# EAGLE board Control_Logic (EAGLE 9.6.2), part 1 of 2
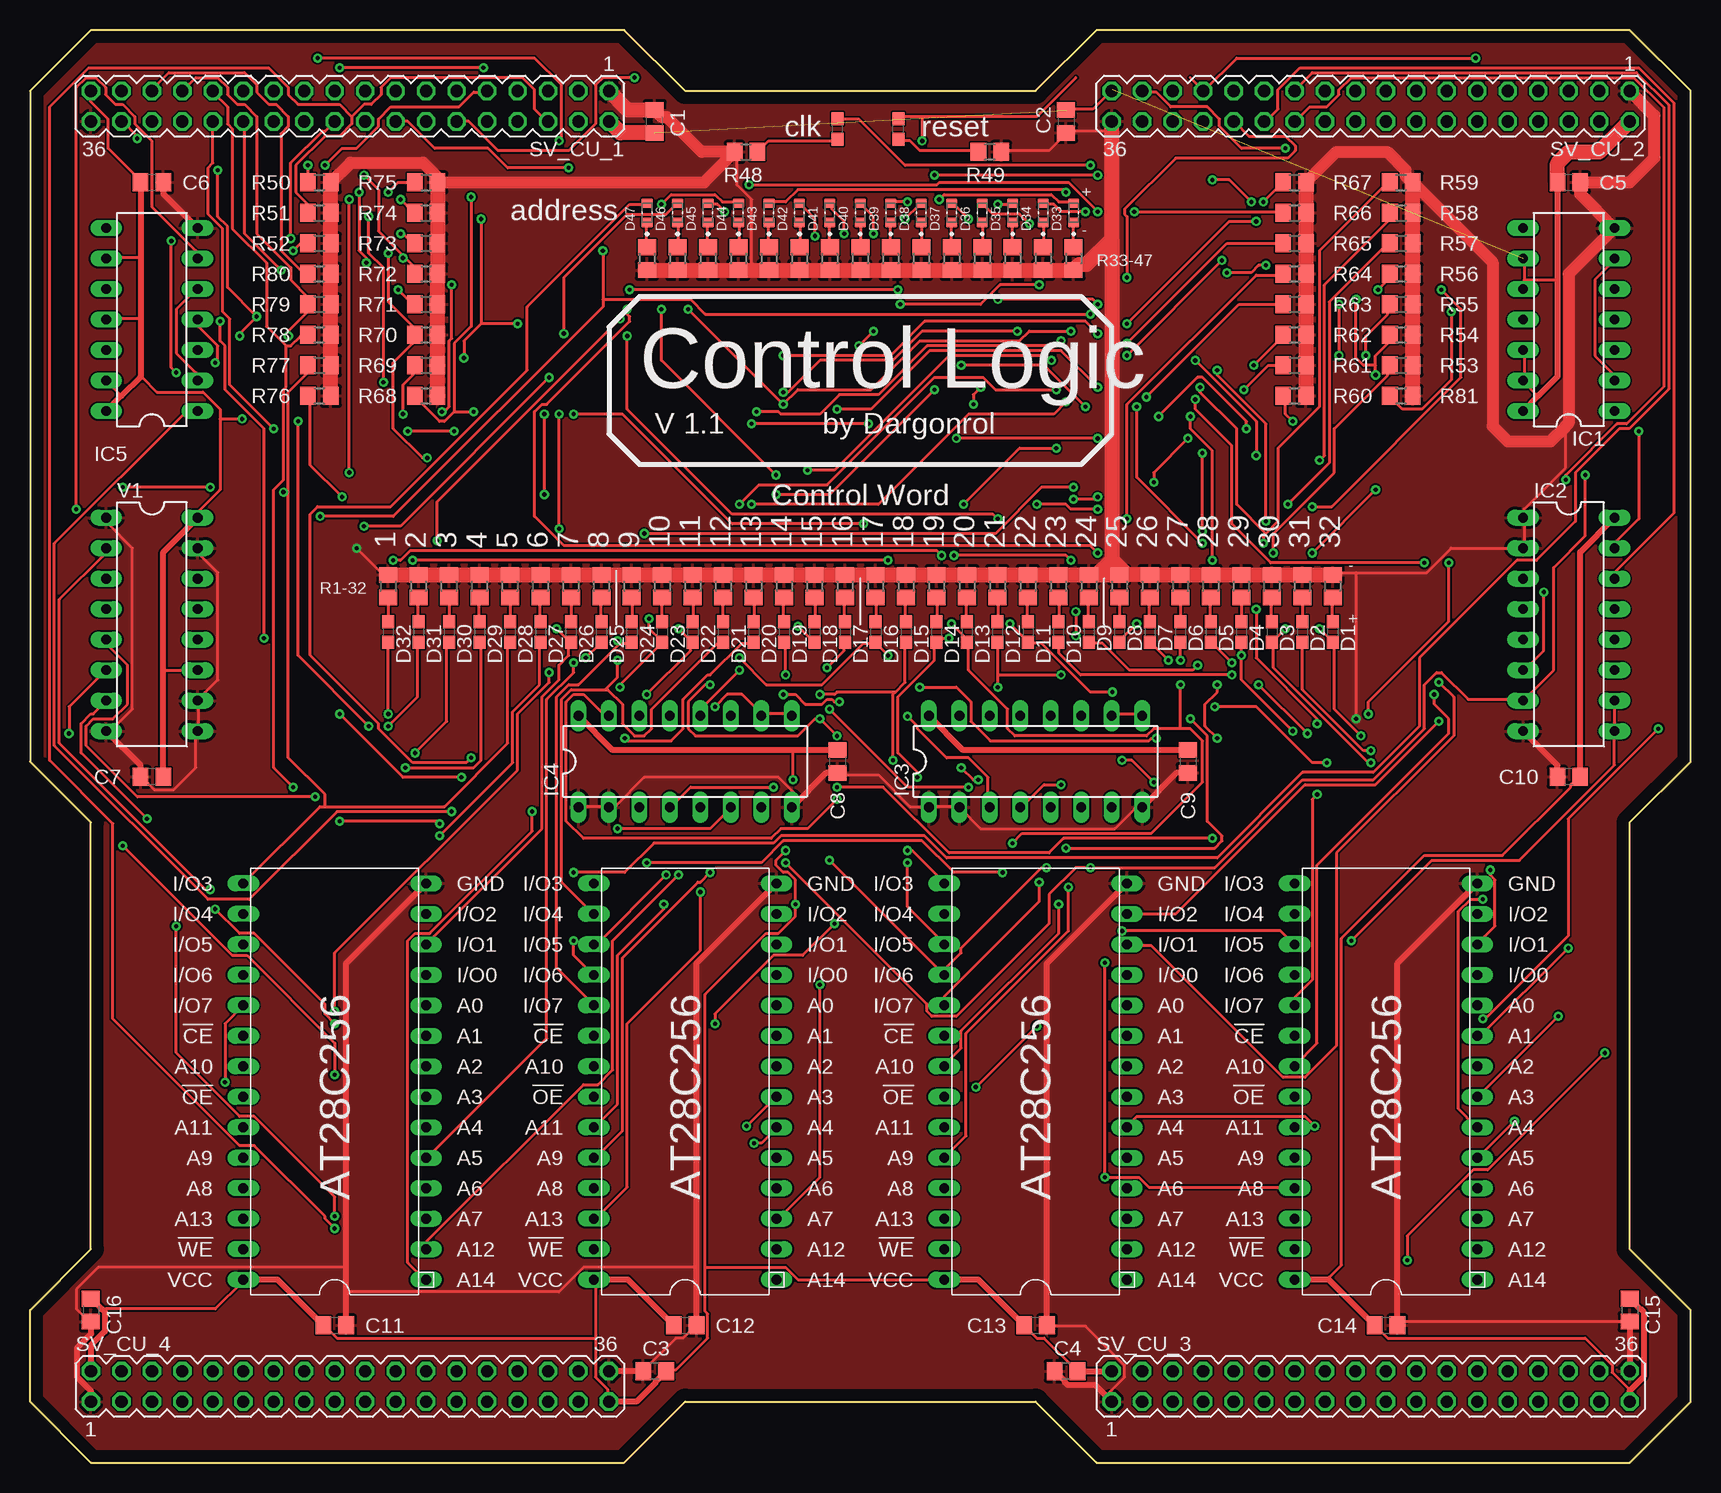
[diagram p0: board, top side]
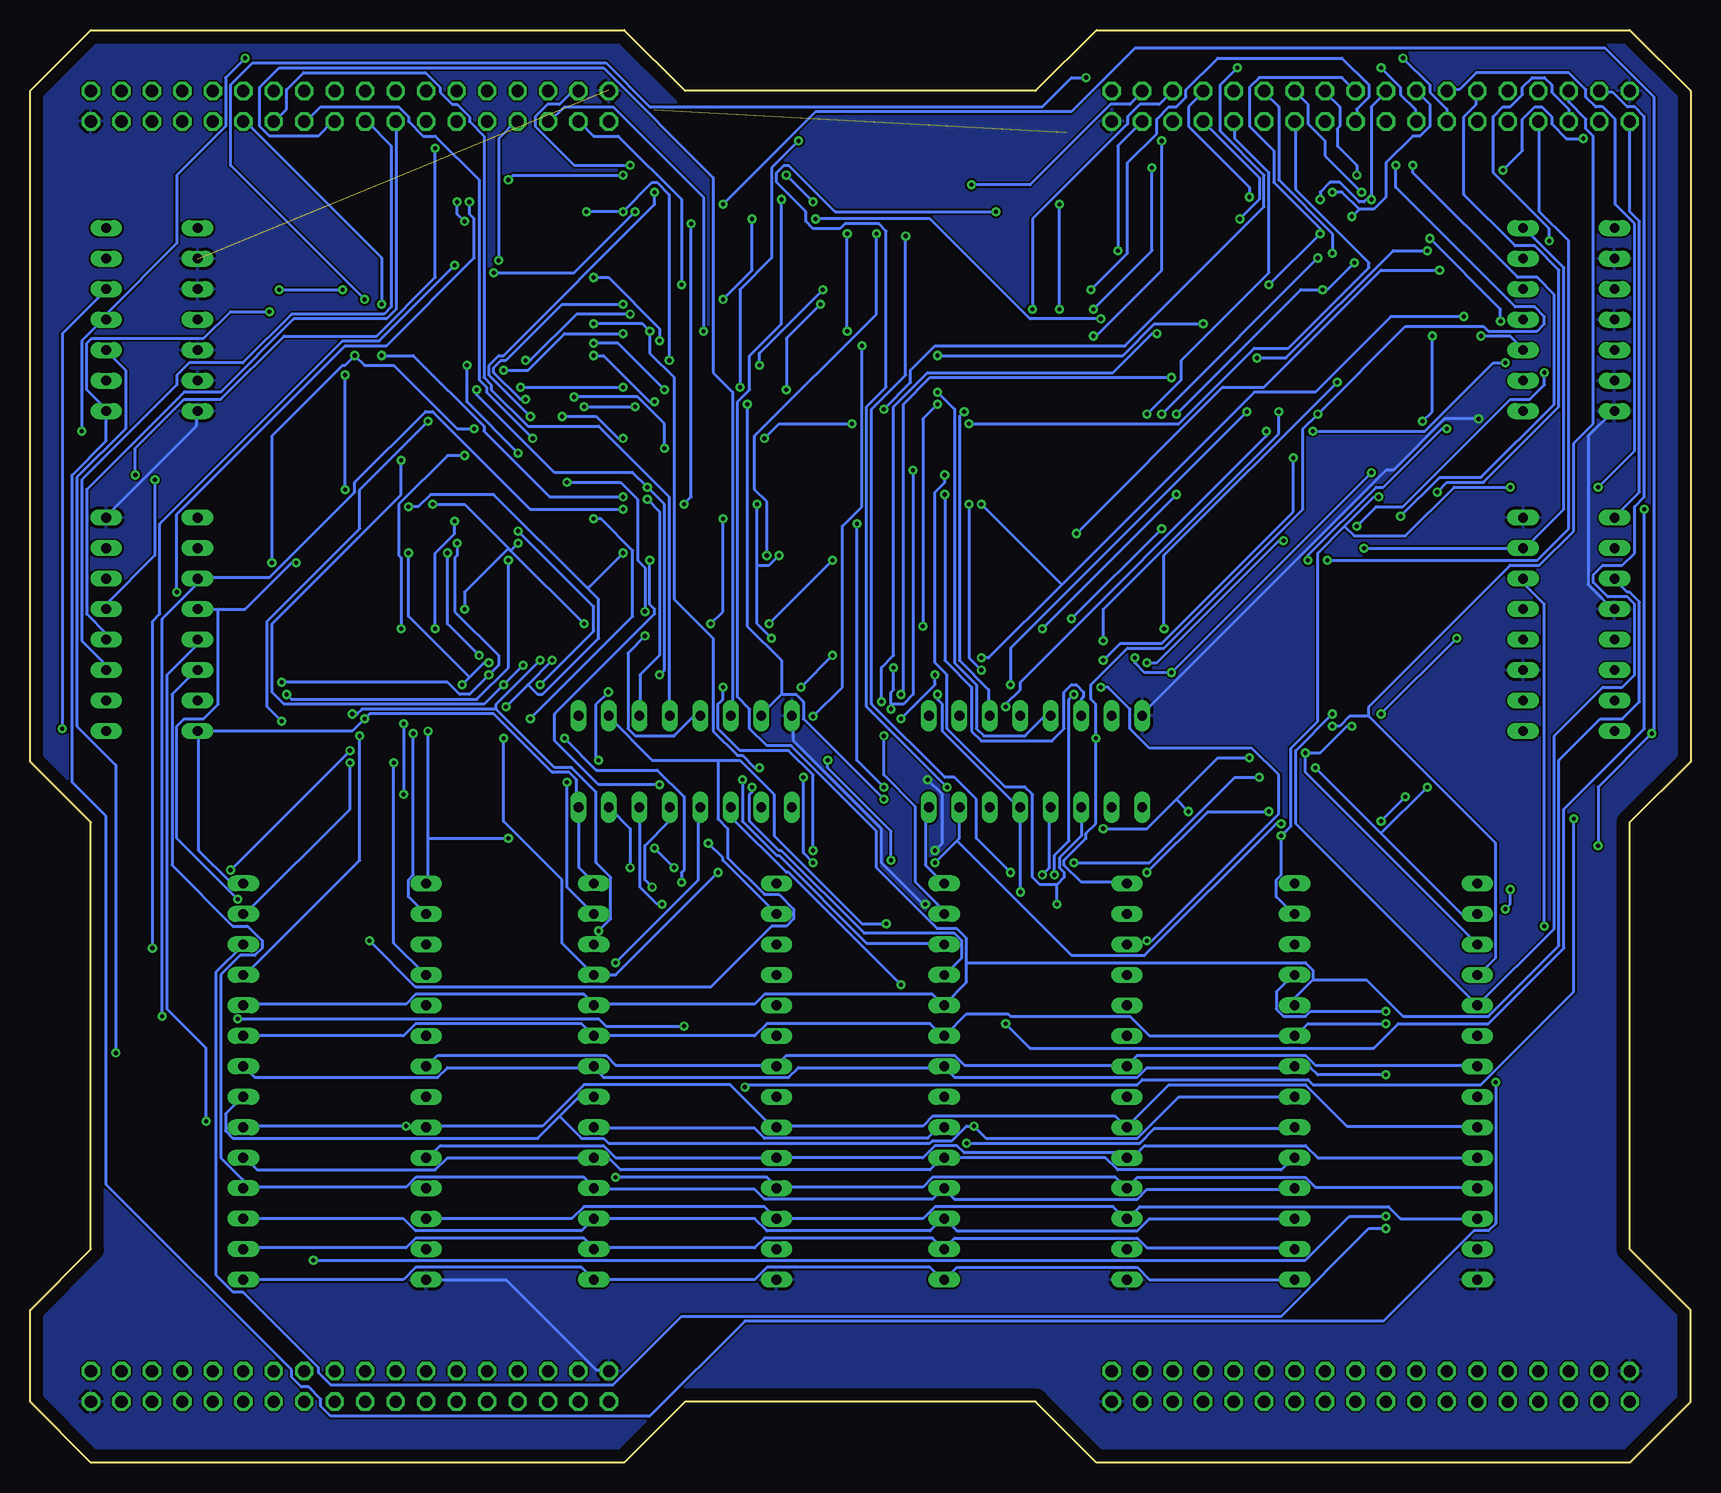
[diagram p1: board, bottom side, seen from below]

Size 138.43 x 119.38 mm. Coordinates in mm from the lower left corner, seen from the top.
Outline: 5.08,0 49.53,0 54.61,5.08 83.82,5.08 88.9,0 133.35,0 138.43,5.08 138.43,12.7 133.35,17.78 133.35,53.34 138.43,58.42 138.43,114.3 133.35,119.38 88.9,119.38 83.82,114.3 54.61,114.3 49.53,119.38 5.08,119.38 0,114.3 0,58.42 5.08,53.34 5.08,17.78 0,12.7 0,5.08 5.08,0
Copper layers (1*16): Top 0.035mm / dielectric 1.5mm / Bottom 0.035mm
Design rules "default *": minimum track width 10mil, minimum drill 0.35mm, track to track 6mil, track to pad 6mil, pad to pad 6mil, via to via 6mil, smd to smd 6mil, copper to edge 40mil, drill to drill 6mil, minimum pad ring 10mil, minimum via ring 8mil, stop-mask expansion 4mil, vias tented up to drill 0mil, thermal gap 10mil

## Footprints (pad centres in the part's own frame; a part is rotated, then mirrored left to right if it is on the bottom)
C0805 = smd 1.3 x 1.5: 1 -0.95,0; 2 0.95,0
0603 = smd 1.1 x 1: 1 -0.85,0; 2 0.85,0
LEDC1608X45N = smd 0.81 x 0.93: A 0.81,0; C -0.81,0
DIL14 = drill 0.813 long: 1 -7.62,-3.81; 2 -5.08,-3.81; 3 -2.54,-3.81; 4 0,-3.81; 5 2.54,-3.81; 6 5.08,-3.81; 7 7.62,-3.81; 8 7.62,3.81; 9 5.08,3.81; 10 2.54,3.81; 11 0,3.81; 12 -2.54,3.81; 13 -5.08,3.81; 14 -7.62,3.81
DIL16 = drill 0.813 long: 1 -8.89,-3.81; 2 -6.35,-3.81; 3 -3.81,-3.81; 4 -1.27,-3.81; 5 1.27,-3.81; 6 3.81,-3.81; 7 6.35,-3.81; 8 8.89,-3.81; 9 8.89,3.81; 10 6.35,3.81; 11 3.81,3.81; 12 1.27,3.81; 13 -1.27,3.81; 14 -3.81,3.81; 15 -6.35,3.81; 16 -8.89,3.81
R0805 = smd 1.3 x 1.5: 1 -0.95,0; 2 0.95,0
MA18-2 = drill 1.016 octagon: 1 -21.59,-1.27; 2 -21.59,1.27; 3 -19.05,-1.27; 4 -19.05,1.27; 5 -16.51,-1.27; 6 -16.51,1.27; 7 -13.97,-1.27; 8 -13.97,1.27; 9 -11.43,-1.27; 10 -11.43,1.27; 11 -8.89,-1.27; 12 -8.89,1.27; 13 -6.35,-1.27; 14 -6.35,1.27; 15 -3.81,-1.27; 16 -3.81,1.27; 17 -1.27,-1.27; 18 -1.27,1.27; 19 1.27,-1.27; 20 1.27,1.27; 21 3.81,-1.27; 22 3.81,1.27; 23 6.35,-1.27; 24 6.35,1.27; 25 8.89,-1.27; 26 8.89,1.27; 27 11.43,-1.27; 28 11.43,1.27; 29 13.97,-1.27; 30 13.97,1.27; 31 16.51,-1.27; 32 16.51,1.27; 33 19.05,-1.27; 34 19.05,1.27; 35 21.59,-1.27; 36 21.59,1.27
AT28C256 = drill 0.813 long: !CE 7.62,-5.08; !OE 7.62,0; !WE 7.62,12.7; A0 -7.62,-7.62; A1 -7.62,-5.08; A2 -7.62,-2.54; A3 -7.62,0; A4 -7.62,2.54; A5 -7.62,5.08; A6 -7.62,7.62; A7 -7.62,10.16; A8 7.62,7.62; A9 7.62,5.08; A10 7.62,-2.54; A11 7.62,2.54; A12 -7.62,12.7; A13 7.62,10.16; A14 -7.62,15.24; GND -7.62,-17.78; I/O0 -7.62,-10.16; I/O1 -7.62,-12.7; I/O2 -7.62,-15.24; I/O3 7.62,-17.78; I/O4 7.62,-15.24; I/O5 7.62,-12.7; I/O6 7.62,-10.16; I/O7 7.62,-7.62; VCC 7.62,15.24

## Placement (x,y rotation side)
C1  [C0805]  52.07,111.76 90 top
C2  [C0805]  86.36,111.76 270 top
C3  [C0805]  52.07,7.62 180 top
C4  [C0805]  86.36,7.62 180 top
C5  [C0805]  128.27,106.68 0 top
C6  [C0805]  10.16,106.68 0 top
C7  [C0805]  10.16,57.15 180 top
C8  [C0805]  67.31,58.42 270 top
C9  [C0805]  96.52,58.42 270 top
C10  [C0805]  128.27,57.15 180 top
C11  [C0805]  25.4,11.43 0 top
C12  [C0805]  54.61,11.43 0 top
C13  [C0805]  83.82,11.43 0 top
C14  [C0805]  113.03,11.43 0 top
C15  [C0805]  133.35,12.7 270 top
C16  [C0805]  5.08,12.7 270 top
CLK_LED  LTST-C193TBKT-5A  [0603]  67.31,111.12 90 top
D1  LTST-C193TBKT-5A  [0603]  108.58,69.22 270 top
D2  LTST-C193TBKT-5A  [0603]  106.05,69.22 270 top
D3  LTST-C193TBKT-5A  [0603]  103.5,69.22 270 top
D4  LTST-C193TBKT-5A  [0603]  100.97,69.22 270 top
D5  LTST-C193TBKT-5A  [0603]  98.42,69.22 270 top
D6  LTST-C193TBKT-5A  [0603]  95.89,69.22 270 top
D7  LTST-C193TBKT-5A  [0603]  93.34,69.22 270 top
D8  LTST-C193TBKT-5A  [0603]  90.81,69.22 270 top
D9  LTST-C193TBKT-5A  [0603]  88.27,69.22 270 top
D10  LTST-C193TBKT-5A  [0603]  85.72,69.22 270 top
D11  LTST-C193TBKT-5A  [0603]  83.19,69.22 270 top
D12  LTST-C193TBKT-5A  [0603]  80.64,69.22 270 top
D13  LTST-C193TBKT-5A  [0603]  78.11,69.22 270 top
D14  LTST-C193TBKT-5A  [0603]  75.56,69.22 270 top
D15  LTST-C193TBKT-5A  [0603]  73.03,69.22 270 top
D16  LTST-C193TBKT-5A  [0603]  70.48,69.22 270 top
D17  LTST-C193TBKT-5A  [0603]  67.94,69.22 270 top
D18  LTST-C193TBKT-5A  [0603]  65.41,69.22 270 top
D19  LTST-C193TBKT-5A  [0603]  62.87,69.22 270 top
D20  LTST-C193TBKT-5A  [0603]  60.33,69.22 270 top
D21  LTST-C193TBKT-5A  [0603]  57.78,69.22 270 top
D22  LTST-C193TBKT-5A  [0603]  55.24,69.22 270 top
D23  LTST-C193TBKT-5A  [0603]  52.7,69.22 270 top
D24  LTST-C193TBKT-5A  [0603]  50.16,69.22 270 top
D25  LTST-C193TBKT-5A  [0603]  47.62,69.22 270 top
D26  LTST-C193TBKT-5A  [0603]  45.09,69.22 270 top
D27  LTST-C193TBKT-5A  [0603]  42.55,69.22 270 top
D28  LTST-C193TBKT-5A  [0603]  40.01,69.22 270 top
D29  LTST-C193TBKT-5A  [0603]  37.47,69.22 270 top
D30  LTST-C193TBKT-5A  [0603]  34.92,69.22 270 top
D31  LTST-C193TBKT-5A  [0603]  32.38,69.22 270 top
D32  LTST-C193TBKT-5A  [0603]  29.84,69.22 270 top
D33  LTST-C193KRKT-5A  [LEDC1608X45N]  87,104.14 90 top
D34  LTST-C193KRKT-5A  [LEDC1608X45N]  84.45,104.14 90 top
D35  LTST-C193KRKT-5A  [LEDC1608X45N]  81.92,104.14 90 top
D36  LTST-C193KRKT-5A  [LEDC1608X45N]  79.38,104.14 90 top
D37  LTST-C193KRKT-5A  [LEDC1608X45N]  76.83,104.14 90 top
D38  LTST-C193KRKT-5A  [LEDC1608X45N]  74.3,104.14 90 top
D39  LTST-C193KRKT-5A  [LEDC1608X45N]  71.75,104.14 90 top
D40  LTST-C193KRKT-5A  [LEDC1608X45N]  69.22,104.14 90 top
D41  LTST-C193KRKT-5A  [LEDC1608X45N]  66.67,104.14 90 top
D42  LTST-C193KRKT-5A  [LEDC1608X45N]  64.14,104.14 90 top
D43  LTST-C193KRKT-5A  [LEDC1608X45N]  61.59,104.14 90 top
D44  LTST-C193KRKT-5A  [LEDC1608X45N]  59.05,104.14 90 top
D45  LTST-C193KRKT-5A  [LEDC1608X45N]  56.52,104.14 90 top
D46  LTST-C193KRKT-5A  [LEDC1608X45N]  53.98,104.14 90 top
D47  LTST-C193KRKT-5A  [LEDC1608X45N]  51.44,104.14 90 top
IC1  74HCT32N  [DIL14]  128.27,95.25 90 top
IC2  74HCT173N  [DIL16]  128.27,69.85 270 top
IC3  74HCT173N  [DIL16]  83.82,58.42 0 top
IC4  74HCT173N  [DIL16]  54.61,58.42 0 top
IC5  74HCT04N  [DIL14]  10.16,95.25 90 top
R1  [R0805]  108.58,73.03 270 top
R2  [R0805]  106.05,73.03 270 top
R3  [R0805]  103.5,73.03 270 top
R4  [R0805]  100.97,73.03 270 top
R5  [R0805]  98.42,73.03 270 top
R6  [R0805]  95.89,73.03 270 top
R7  [R0805]  93.34,73.03 270 top
R8  [R0805]  90.81,73.03 270 top
R9  [R0805]  88.27,73.03 270 top
R10  [R0805]  85.72,73.03 270 top
R11  [R0805]  83.19,73.03 270 top
R12  [R0805]  80.64,73.03 270 top
R13  [R0805]  78.11,73.03 270 top
R14  [R0805]  75.56,73.03 270 top
R15  [R0805]  73.03,73.03 270 top
R16  [R0805]  70.48,73.03 270 top
R17  [R0805]  67.94,73.03 270 top
R18  [R0805]  65.41,73.03 270 top
R19  [R0805]  62.87,73.03 270 top
R20  [R0805]  60.33,73.03 270 top
R21  [R0805]  57.78,73.03 270 top
R22  [R0805]  55.24,73.03 270 top
R23  [R0805]  52.7,73.03 270 top
R24  [R0805]  50.16,73.03 270 top
R25  [R0805]  47.62,73.03 270 top
R26  [R0805]  45.09,73.03 270 top
R27  [R0805]  42.55,73.03 270 top
R28  [R0805]  40.01,73.03 270 top
R29  [R0805]  37.47,73.03 270 top
R30  [R0805]  34.92,73.03 270 top
R31  [R0805]  32.38,73.03 270 top
R32  [R0805]  29.84,73.03 270 top
R33  [R0805]  87,100.33 270 top
R34  [R0805]  84.45,100.33 270 top
R35  [R0805]  81.92,100.33 270 top
R36  [R0805]  79.38,100.33 270 top
R37  [R0805]  76.83,100.33 270 top
R38  [R0805]  74.3,100.33 270 top
R39  [R0805]  71.75,100.33 270 top
R40  [R0805]  69.22,100.33 270 top
R41  [R0805]  66.67,100.33 270 top
R42  [R0805]  64.14,100.33 270 top
R43  [R0805]  61.59,100.33 270 top
R44  [R0805]  59.05,100.33 270 top
R45  [R0805]  56.52,100.33 270 top
R46  [R0805]  53.98,100.33 270 top
R47  [R0805]  51.44,100.33 270 top
R48  [R0805]  59.69,109.22 0 top
R49  [R0805]  80.01,109.22 180 top
R50  [R0805]  24.13,106.68 0 top
R51  [R0805]  24.13,104.14 0 top
R52  [R0805]  24.13,101.6 0 top
R53  [R0805]  114.3,91.44 0 top
R54  [R0805]  114.3,93.98 0 top
R55  [R0805]  114.3,96.52 0 top
R56  [R0805]  114.3,99.06 0 top
R57  [R0805]  114.3,101.6 0 top
R58  [R0805]  114.3,104.14 0 top
R59  [R0805]  114.3,106.68 0 top
R60  [R0805]  105.41,88.9 0 top
R61  [R0805]  105.41,91.44 0 top
R62  [R0805]  105.41,93.98 0 top
R63  [R0805]  105.41,96.52 0 top
R64  [R0805]  105.41,99.06 0 top
R65  [R0805]  105.41,101.6 0 top
R66  [R0805]  105.41,104.14 0 top
R67  [R0805]  105.41,106.68 0 top
R68  [R0805]  33.02,88.9 0 top
R69  [R0805]  33.02,91.44 0 top
R70  [R0805]  33.02,93.98 0 top
R71  [R0805]  33.02,96.52 0 top
R72  [R0805]  33.02,99.06 0 top
R73  [R0805]  33.02,101.6 0 top
R74  [R0805]  33.02,104.14 0 top
R75  [R0805]  33.02,106.68 0 top
R76  [R0805]  24.13,88.9 0 top
R77  [R0805]  24.13,91.44 0 top
R78  [R0805]  24.13,93.98 0 top
R79  [R0805]  24.13,96.52 0 top
R80  [R0805]  24.13,99.06 0 top
R81  [R0805]  114.3,88.9 0 top
RESET_LED  LTST-C193TBKT-5A  [0603]  72.39,111.12 90 top
SV_CU_1  [MA18-2]  26.67,113.03 180 top
SV_CU_2  [MA18-2]  111.76,113.03 180 top
SV_CU_3  [MA18-2]  111.76,6.35 0 top
SV_CU_4  [MA18-2]  26.67,6.35 0 top
U$1  AT28C256  [AT28C256]  113.03,30.48 180 top
U$2  AT28C256  [AT28C256]  83.82,30.48 180 top
U$3  AT28C256  [AT28C256]  54.61,30.48 180 top
U$4  AT28C256  [AT28C256]  25.4,30.48 180 top
V1  74193N  [DIL16]  10.16,69.85 270 top

## Library data of the parts
C1-C16 = rcl; SPICEPREFIX: C
CLK_LED D1-D32 RESET_LED U$1-U$4 = Dargon's_lib
D33-D47 = Dargon's_lib; MANUFACTURER: Lite-On; MAXIMUM_PACKAGE_HEIGHT: 0.45 mm; PARTREV: C; STANDARD: IPC 7351B
IC1-IC5 = 74xx-eu
R1-R81 = rcl; SPICEPREFIX: R
SV_CU_1-SV_CU_4 = con-lstb; OC_FARNELL: unknown; OC_NEWARK: unknown
V1 = 74ttl-din

## Nets
BUS_CLK: CLK_LED.2 IC2.7 IC3.7 IC4.7 SV_CU_2.33 V1.5
BUS_CLK_INV: SV_CU_2.31
BUS_CTRL1_REG_A_1: D1.2 R50.1 SV_CU_1.4 U$1.I/O0
BUS_CTRL2_REG_A_2: D2.2 R51.1 SV_CU_1.6 U$1.I/O1
BUS_CTRL3_REG_A_3: D3.2 R52.1 SV_CU_1.8 U$1.I/O2
BUS_CTRL4_REG_A_4: D4.2 R53.1 SV_CU_1.10 U$1.I/O3
BUS_CTRL5_REG_L_1: D5.2 R54.1 SV_CU_1.12 U$1.I/O4
BUS_CTRL6_REG_L_2: D6.2 R55.1 SV_CU_1.14 U$1.I/O5
BUS_CTRL7_REG_L_3: D7.2 R56.1 SV_CU_1.16 U$1.I/O6
BUS_CTRL8_REG_L_4: D8.2 R57.1 SV_CU_1.18 U$1.I/O7
BUS_CTRL9_16REG_A_ADDR_1: D9.2 R58.1 SV_CU_1.20 U$2.I/O0
BUS_CTRL10_16REG_A_ADDR_2: D10.2 R59.1 SV_CU_1.22 U$2.I/O1
BUS_CTRL11_16REG_A_ADDR_3: D11.2 R60.1 SV_CU_1.24 U$2.I/O2
BUS_CTRL12_CREG_INC_1: D12.2 R61.1 SV_CU_1.26 U$2.I/O3
BUS_CTRL13_CREG_INC_2: D13.2 R62.1 SV_CU_1.28 U$2.I/O4
BUS_CTRL14_CREG_DEC_1: D14.2 R63.1 SV_CU_1.30 U$2.I/O5
BUS_CTRL15_CREG_DEC_2: D15.2 R64.1 SV_CU_1.32 U$2.I/O6
BUS_CTRL16_FLAGS: D16.2 IC5.3 R65.1 SV_CU_1.34 U$2.I/O7
BUS_CTRL17_GPR_A_ALU_R_1: D17.2 R66.1 SV_CU_1.3 U$3.I/O0
BUS_CTRL18_GPR_A_ALU_R_2: D18.2 R67.1 SV_CU_1.5 U$3.I/O1
BUS_CTRL19_GPR_A_ALU_R_3: D19.2 R68.1 SV_CU_1.7 U$3.I/O2
BUS_CTRL20_GPR_A_ALU_L_1: D20.2 R69.1 SV_CU_1.9 U$3.I/O3
BUS_CTRL21_GPR_A_ALU_L_2: D21.2 R70.1 SV_CU_1.11 U$3.I/O4
BUS_CTRL22_GPR_A_ALU_L_3: D22.2 R71.1 SV_CU_1.13 U$3.I/O5
BUS_CTRL23_NONE_1: D23.2 R72.1 SV_CU_1.15 U$3.I/O6
BUS_CTRL24_NONE_2: D24.2 R73.1 SV_CU_1.17 U$3.I/O7
BUS_CTRL25_ALU_OP_1: D25.2 R74.1 SV_CU_1.19 U$4.I/O0
BUS_CTRL26_ALU_OP_2: D26.2 R75.1 SV_CU_1.21 U$4.I/O1
BUS_CTRL27_ALU_OP_3: D27.2 R76.1 SV_CU_1.23 U$4.I/O2
BUS_CTRL28_ALU_OP_4: D28.2 R77.1 SV_CU_1.25 U$4.I/O3
BUS_CTRL29_DPLY_RS: D29.2 R78.1 SV_CU_1.27 U$4.I/O4
BUS_CTRL30_DPLY_RW: D30.2 R79.1 SV_CU_1.29 U$4.I/O5
BUS_CTRL31_HLT: D31.2 R80.1 SV_CU_1.31 U$4.I/O6
BUS_CTRL32_RST_STEP: D32.2 IC1.1 R81.1 SV_CU_1.33 U$4.I/O7
BUS_CTRL_IR_LOAD: IC5.1 SV_CU_2.23
BUS_FLAG_1: IC4.14 SV_CU_2.34
BUS_FLAG_2: IC4.13 SV_CU_2.32
BUS_FLAG_3: IC4.12 SV_CU_2.30
BUS_FLAG_4: IC4.11 SV_CU_2.28
BUS_MEMORY_BUS_0: IC2.14 SV_CU_2.26
BUS_MEMORY_BUS_1: IC2.13 SV_CU_2.24
BUS_MEMORY_BUS_2: IC2.12 SV_CU_2.22
BUS_MEMORY_BUS_3: IC2.11 SV_CU_2.20
BUS_MEMORY_BUS_4: IC3.14 SV_CU_2.18
BUS_MEMORY_BUS_5: IC3.13 SV_CU_2.16
BUS_MEMORY_BUS_6: IC3.12 SV_CU_2.14
BUS_MEMORY_BUS_7: IC3.11 SV_CU_2.12
BUS_RESET: IC1.4 IC2.15 IC3.15 IC4.15 RESET_LED.2 SV_CU_2.29
BUS_RESET_INV: SV_CU_2.27
CTRL_MANUAL_WRITE: SV_CU_2.19
FLAG_1: D44.A IC4.3 U$1.A11 U$2.A11 U$3.A11 U$4.A11
FLAG_2: D45.A IC4.4 U$1.A12 U$2.A12 U$3.A12 U$4.A12
FLAG_3: D46.A IC4.5 U$1.A13 U$2.A13 U$3.A13 U$4.A13
FLAG_4: D47.A IC4.6 U$1.A14 U$2.A14 U$3.A14 U$4.A14
GND: C1.2 C2.2 C3.2 C4.2 C5.2 C6.2 C7.2 C8.2 C9.2 C10.2 C11.2 C12.2 C13.2 C14.2 C15.2 C16.2 IC1.7 IC2.1 IC2.2 IC2.8 IC3.1 IC3.2 IC3.8 IC4.1 IC4.2 IC4.8 IC5.7 R1.1 R2.1 R3.1 R4.1 R5.1 R6.1 R7.1 R8.1 R9.1 R10.1 R11.1 R12.1 R13.1 R14.1 R15.1 R16.1 R17.1 R18.1 R19.1 R20.1 R21.1 R22.1 R23.1 R24.1 R25.1 R26.1 R27.1 R28.1 R29.1 R30.1 R31.1 R32.1 R33.2 R34.2 R35.2 R36.2 R37.2 R38.2 R39.2 R40.2 R41.2 R42.2 R43.2 R44.2 R45.2 R46.2 R47.2 R48.1 R49.1 R50.2 R51.2 R52.2 R53.2 R54.2 R55.2 R56.2 R57.2 R58.2 R59.2 R60.2 R61.2 R62.2 R63.2 R64.2 R65.2 R66.2 R67.2 R68.2 R69.2 R70.2 R71.2 R72.2 R73.2 R74.2 R75.2 R76.2 R77.2 R78.2 R79.2 R80.2 R81.2 SV_CU_1.1 SV_CU_1.36 SV_CU_2.1 SV_CU_2.36 SV_CU_3.1 SV_CU_3.36 SV_CU_4.1 SV_CU_4.36 U$1.GND U$2.GND U$3.GND U$4.GND V1.1 V1.8 V1.9 V1.10 V1.15
N$1: IC4.9 IC4.10 IC5.4
N$2: U$4.!WE
N$3: U$4.!CE
N$4: U$4.!OE
N$5: U$3.!WE
N$6: IC2.9 IC2.10 IC3.9 IC3.10 IC5.6
N$7: U$3.!CE
N$8: D1.1 R1.2
N$9: D2.1 R2.2
N$10: D3.1 R3.2
N$11: U$3.!OE
N$12: D4.1 R4.2
N$13: D5.1 R5.2
N$14: D6.1 R6.2
N$15: D7.1 R7.2
N$16: U$2.!WE
N$17: U$2.!CE
N$18: U$2.!OE
N$19: D8.1 R8.2
N$20: D9.1 R9.2
N$21: D10.1 R10.2
N$22: D11.1 R11.2
N$23: U$1.!WE
N$24: U$1.!CE
N$25: U$1.!OE
N$26: D12.1 R12.2
N$27: D13.1 R13.2
N$28: D14.1 R14.2
N$29: D15.1 R15.2
N$30: D16.1 R16.2
N$31: D17.1 R17.2
N$32: D18.1 R18.2
N$33: D19.1 R19.2
N$34: D20.1 R20.2
N$35: D21.1 R21.2
N$36: D22.1 R22.2
N$37: D23.1 R23.2
N$38: D24.1 R24.2
N$39: D25.1 R25.2
N$40: D26.1 R26.2
N$41: D27.1 R27.2
N$42: D28.1 R28.2
N$43: D29.1 R29.2
N$44: D30.1 R30.2
N$45: D31.1 R31.2
N$46: D32.1 R32.2
N$47: D33.C R33.1
N$48: D34.C R34.1
N$49: D35.C R35.1
N$50: D36.C R36.1
N$51: D37.C R37.1
N$52: D38.C R38.1
N$53: D39.C R39.1
N$54: D40.C R40.1
N$55: D41.C R41.1
N$56: D42.C R42.1
N$57: D43.C R43.1
N$58: D44.C R44.1
N$59: D45.C R45.1
N$60: D46.C R46.1
N$61: IC1.5 V1.7
N$62: D47.C R47.1
N$63: CLK_LED.1 R48.2
N$64: IC1.3 V1.14
N$65: IC1.2 IC1.6
N$66: R49.2 RESET_LED.1
N$67: IC5.2 IC5.5
OP-CODE_1: D36.A IC2.3 U$1.A3 U$2.A3 U$3.A3 U$4.A3
OP-CODE_2: D37.A IC2.4 U$1.A4 U$2.A4 U$3.A4 U$4.A4
OP-CODE_3: D38.A IC2.5 U$1.A5 U$2.A5 U$3.A5 U$4.A5
OP-CODE_4: D39.A IC2.6 U$1.A6 U$2.A6 U$3.A6 U$4.A6
OP-CODE_5: D40.A IC3.3 U$1.A7 U$2.A7 U$3.A7 U$4.A7
OP-CODE_6: D41.A IC3.4 U$1.A8 U$2.A8 U$3.A8 U$4.A8
OP-CODE_7: D42.A IC3.5 U$1.A9 U$2.A9 U$3.A9 U$4.A9
OP-CODE_8: D43.A IC3.6 U$1.A10 U$2.A10 U$3.A10 U$4.A10
STEP_1: D33.A U$1.A0 U$2.A0 U$3.A0 U$4.A0 V1.3
STEP_2: D34.A U$1.A1 U$2.A1 U$3.A1 U$4.A1 V1.2
STEP_3: D35.A U$1.A2 U$2.A2 U$3.A2 U$4.A2 V1.6
VCC: C1.1 C2.1 C3.1 C4.1 C5.1 C6.1 C7.1 C8.1 C9.1 C10.1 C11.1 C12.1 C13.1 C14.1 C15.1 C16.1 IC1.9 IC1.10 IC1.12 IC1.13 IC1.14 IC2.16 IC3.16 IC4.16 IC5.9 IC5.11 IC5.13 IC5.14 SV_CU_1.2 SV_CU_1.35 SV_CU_2.2 SV_CU_2.35 SV_CU_3.2 SV_CU_3.35 SV_CU_4.2 SV_CU_4.35 U$1.VCC U$2.VCC U$3.VCC U$4.VCC V1.4 V1.11 V1.16